# Altium PCB 四层板V3.0（改4s电池的那版）.PcbDoc (part 1 of 2)
Units mil, origin at the board's own origin, x right, y up, seen from the top; angles counter-clockwise.
Board outline 3411.06 x 2789.06 mil, 4 copper layers (Top Layer, GND, POW, Bottom Layer), stack 23.756 mil thick; 112 components, 75 nets, 401 pads, 165 vias.
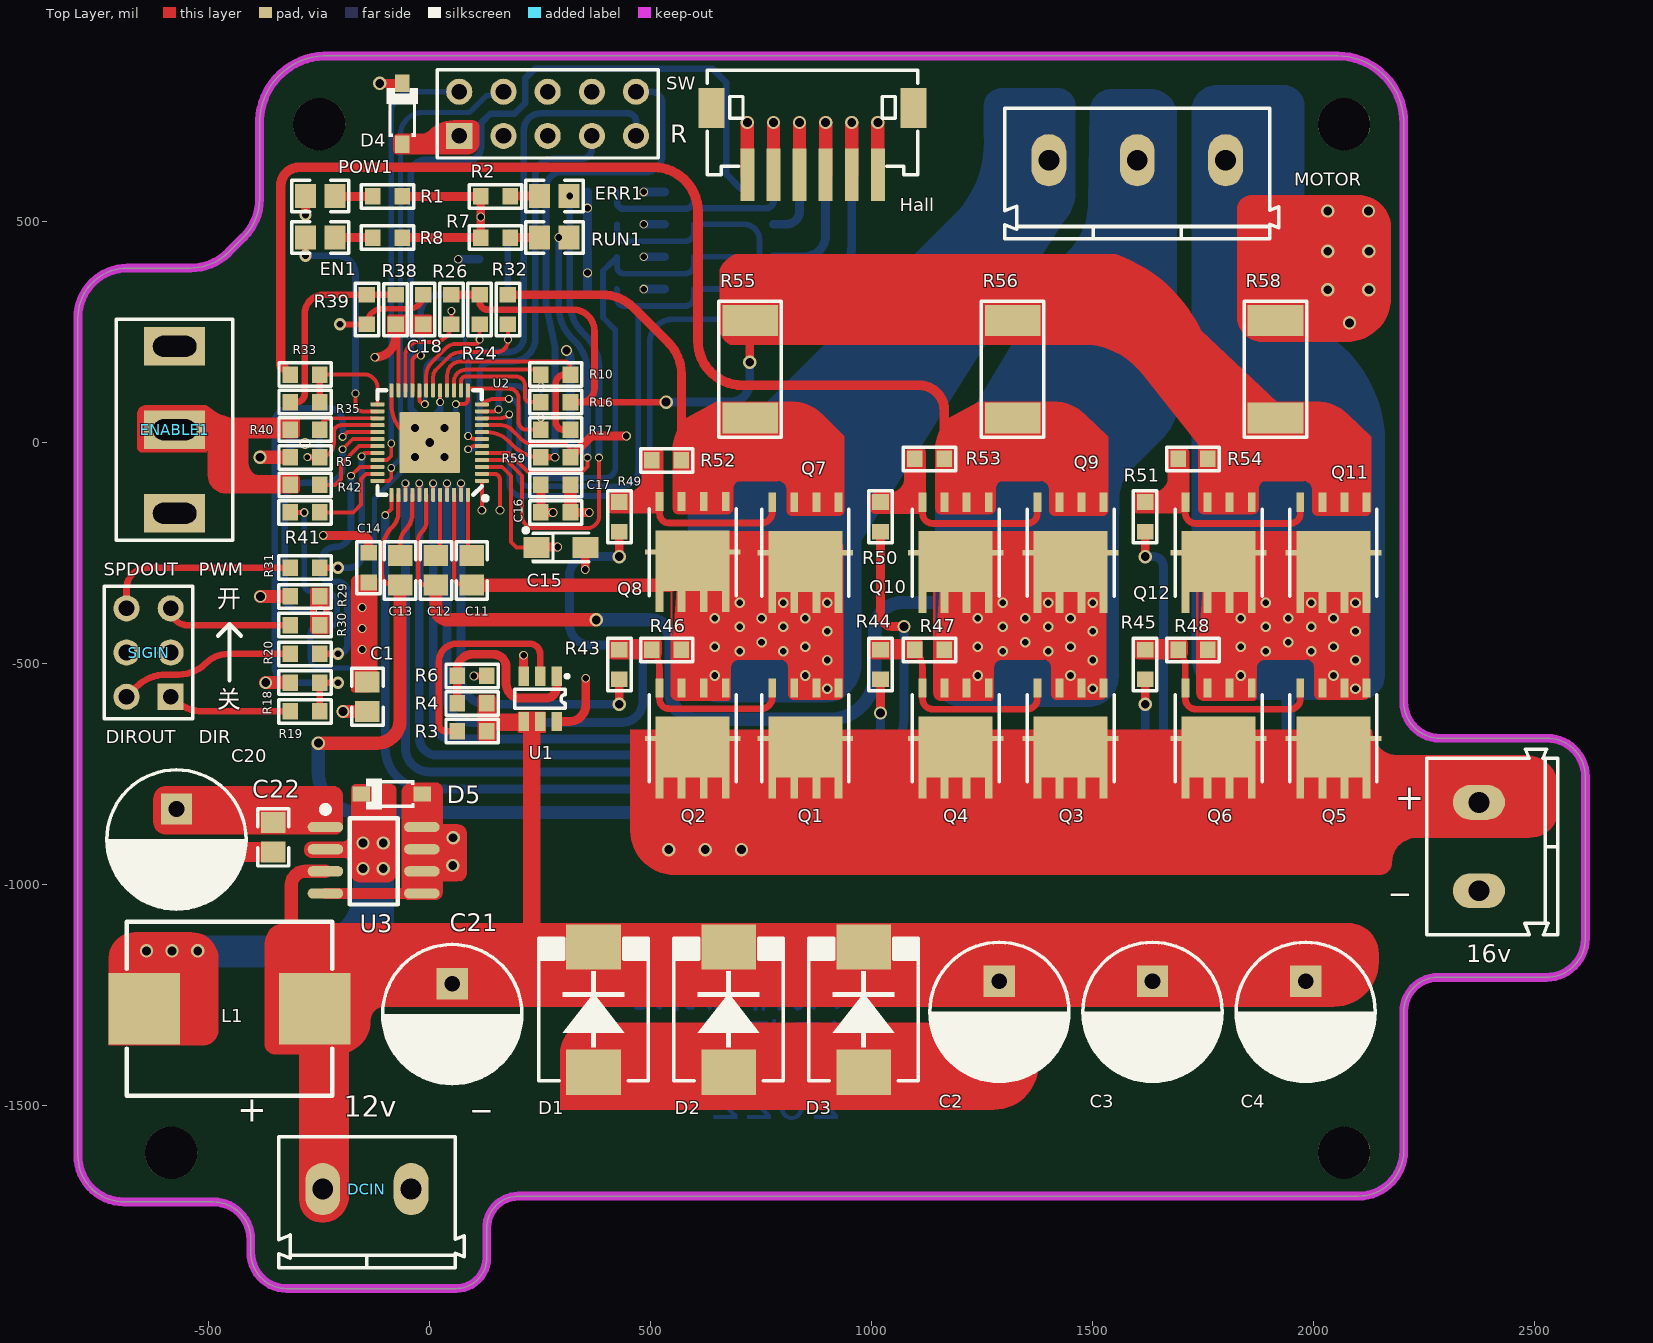
[diagram p0: Top Layer view]
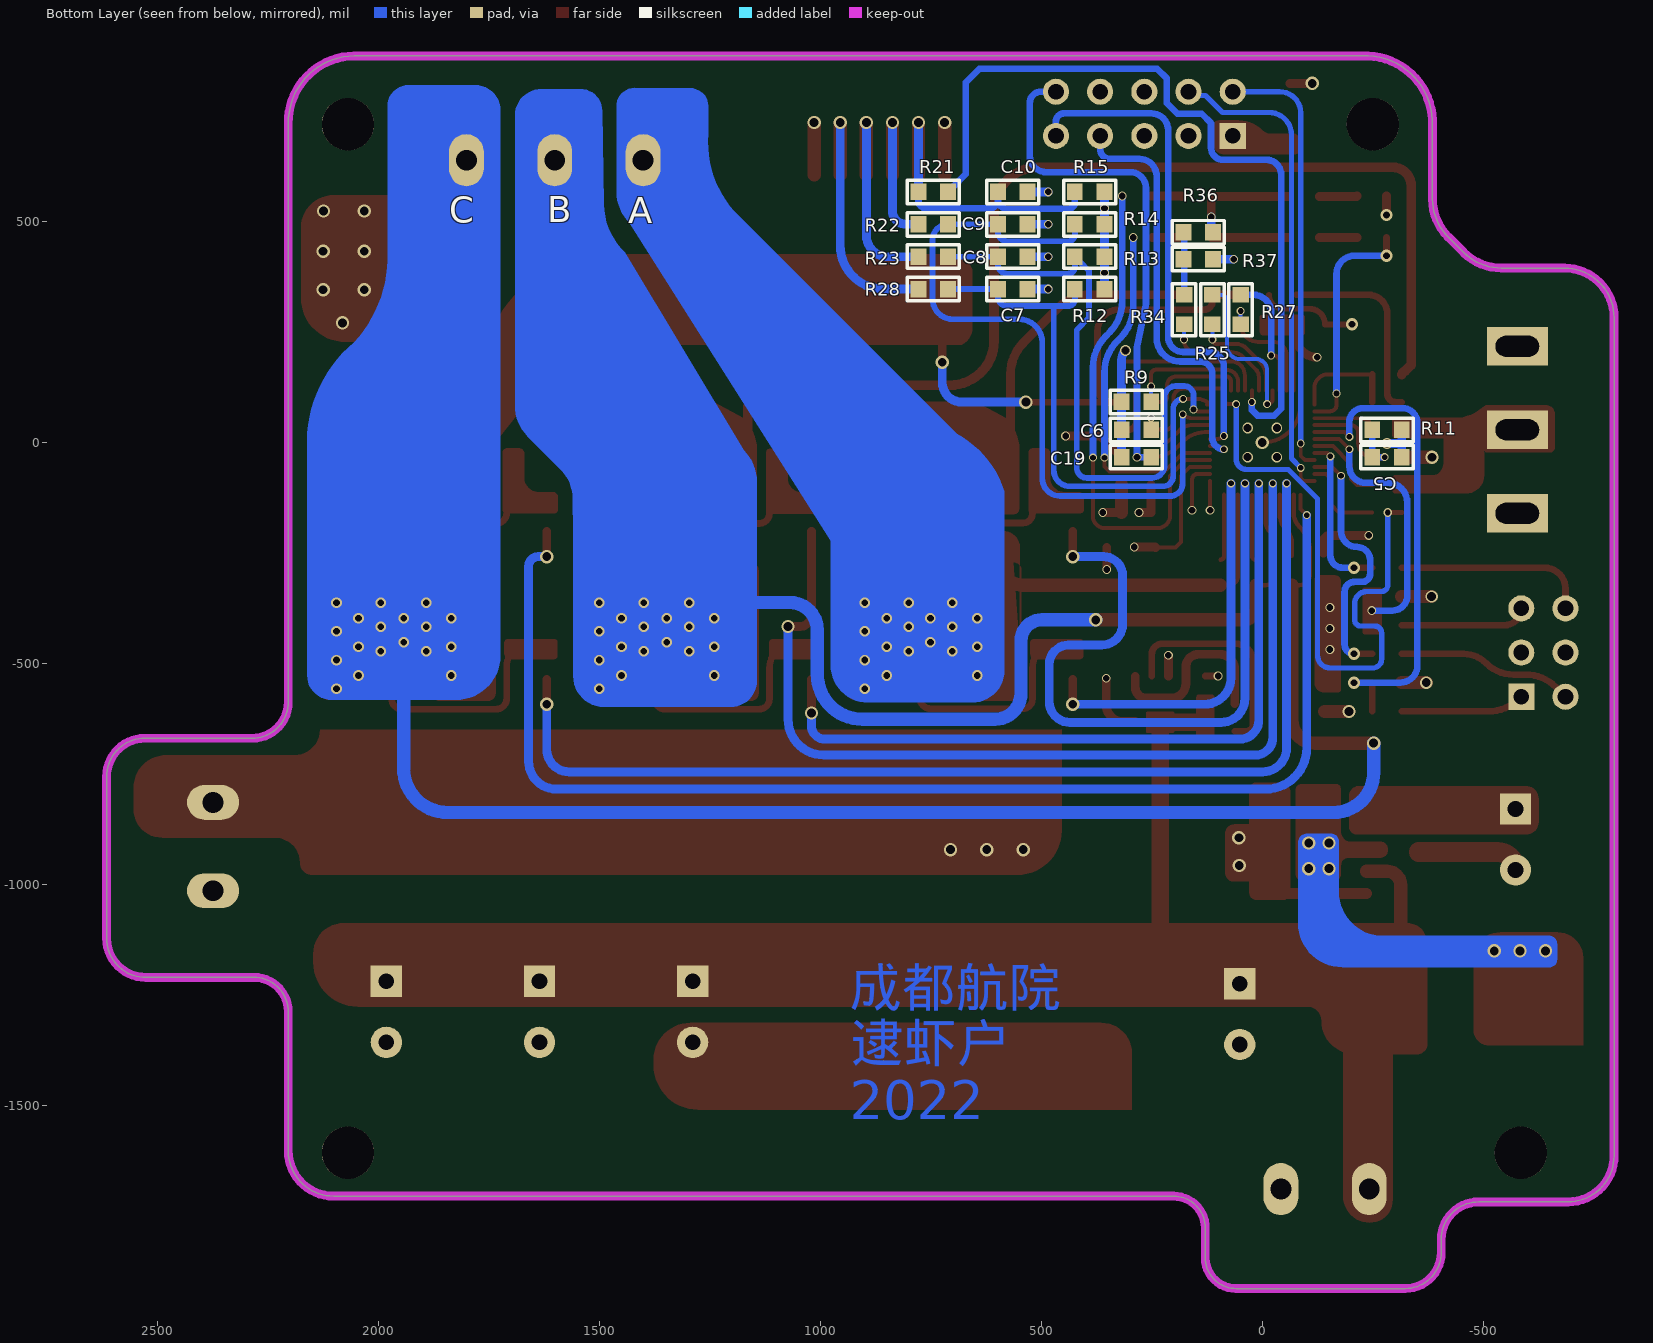
[diagram p1: Bottom Layer view, seen from below]
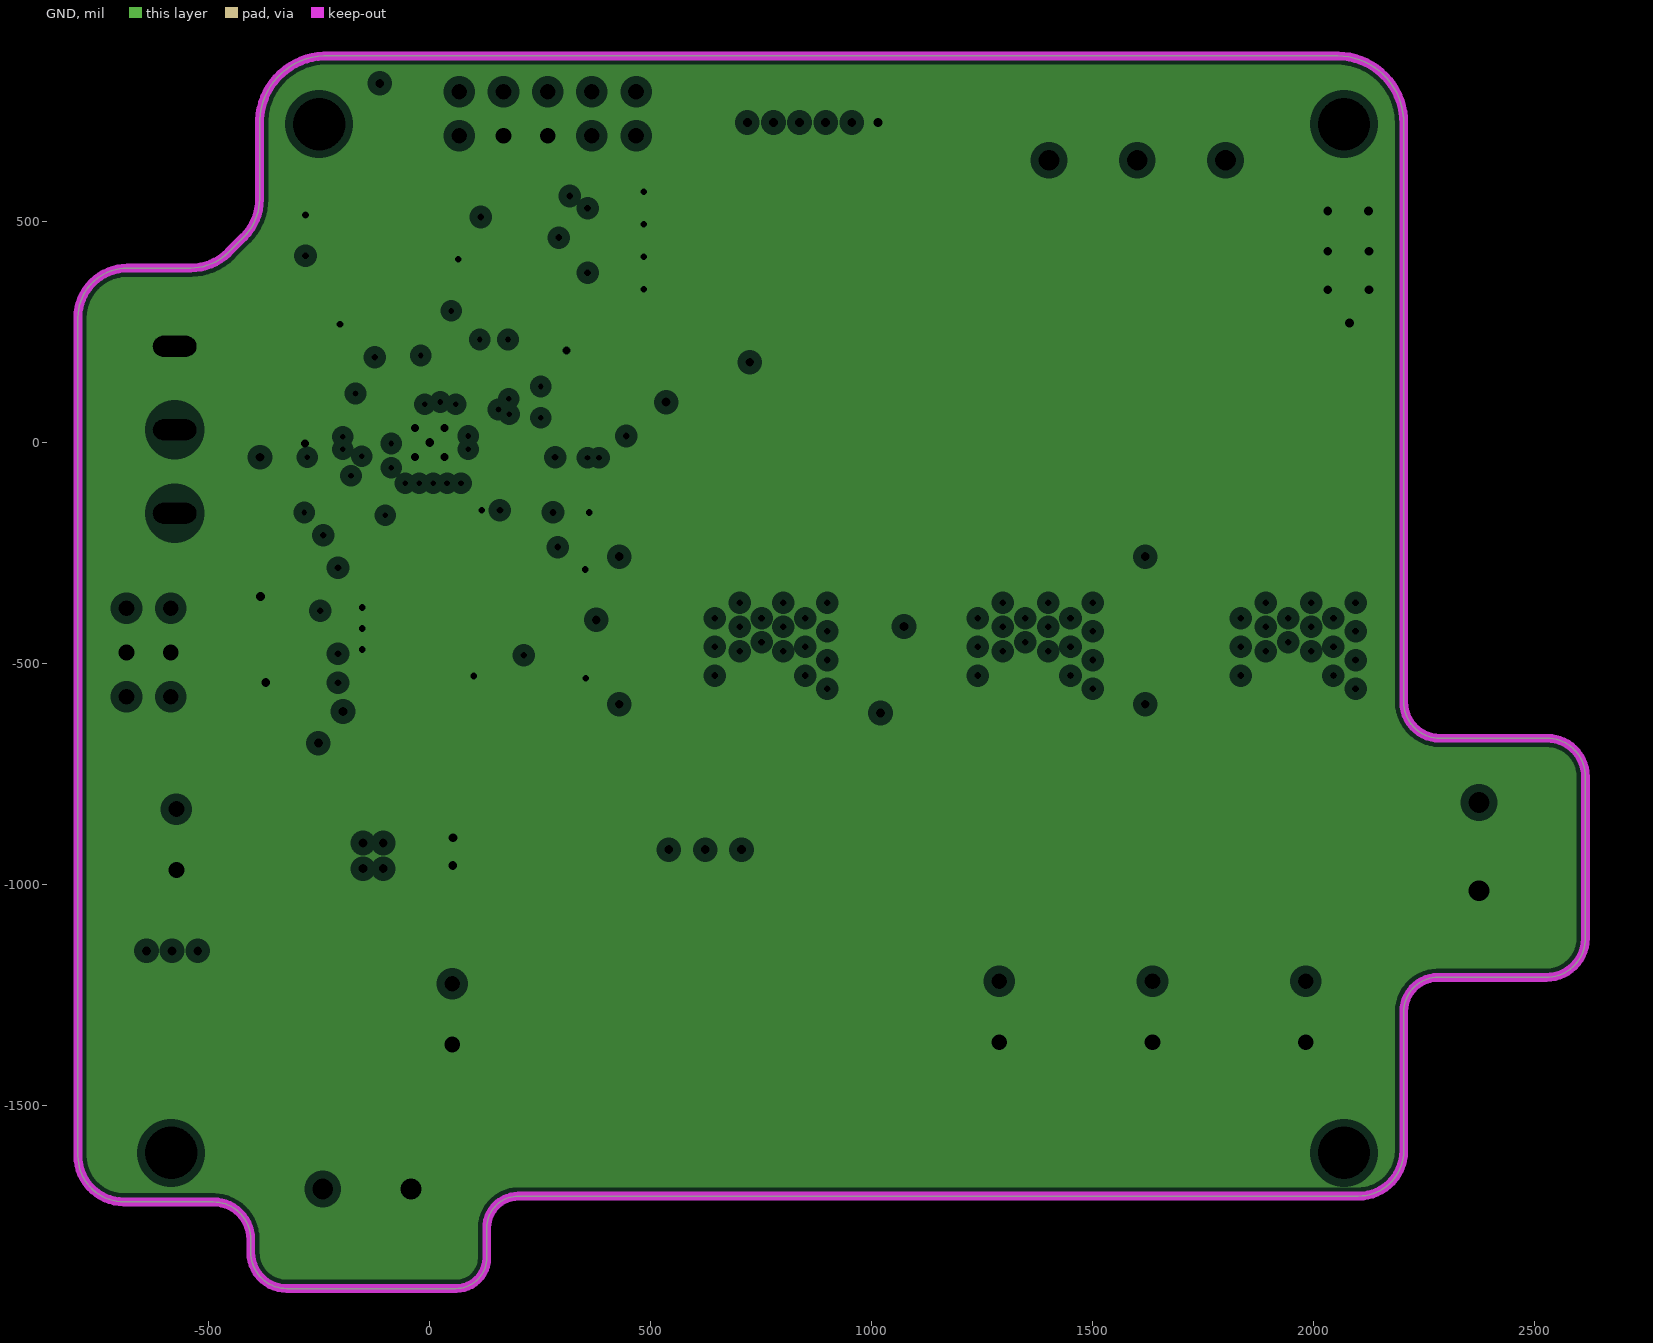
[diagram p2: GND, clearances drawn from the general rule]
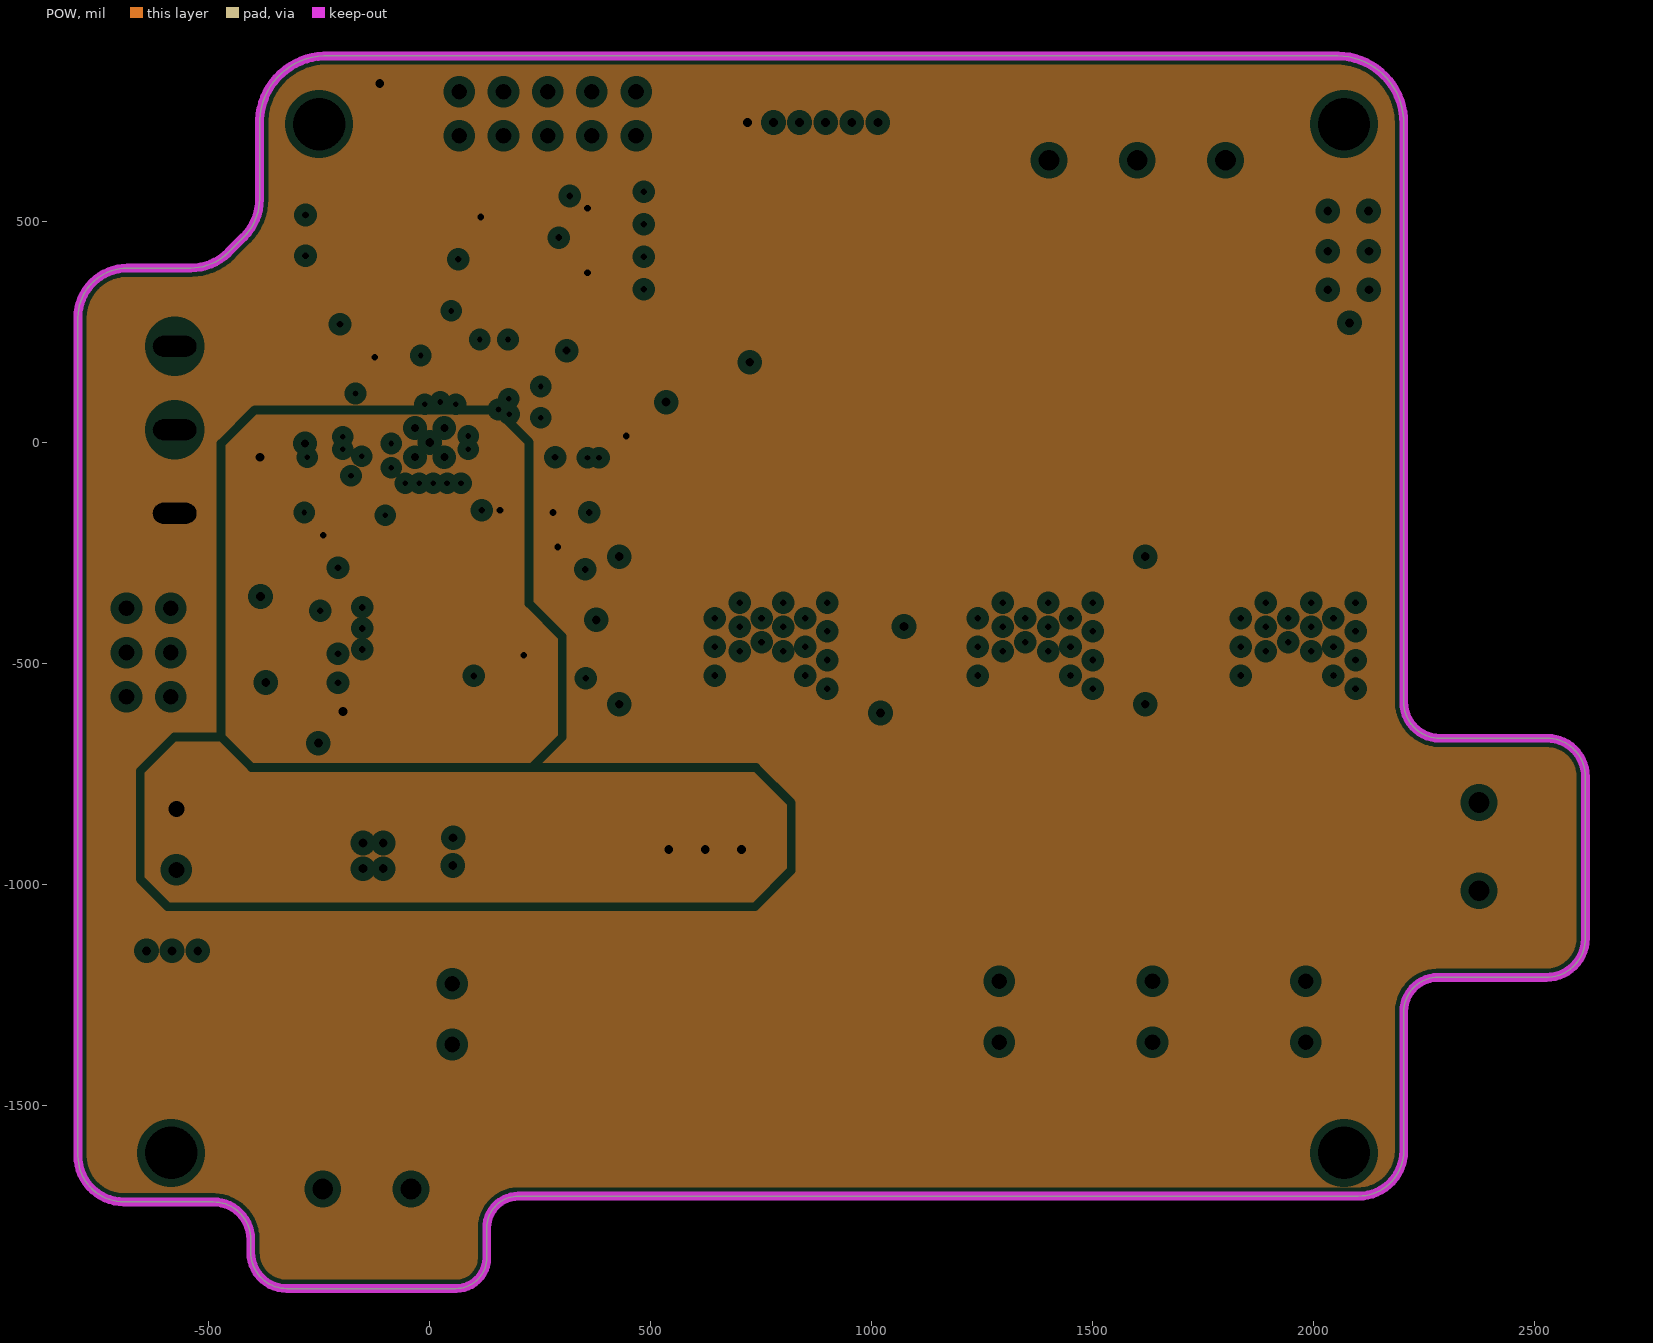
[diagram p3: POW, clearances drawn from the general rule]
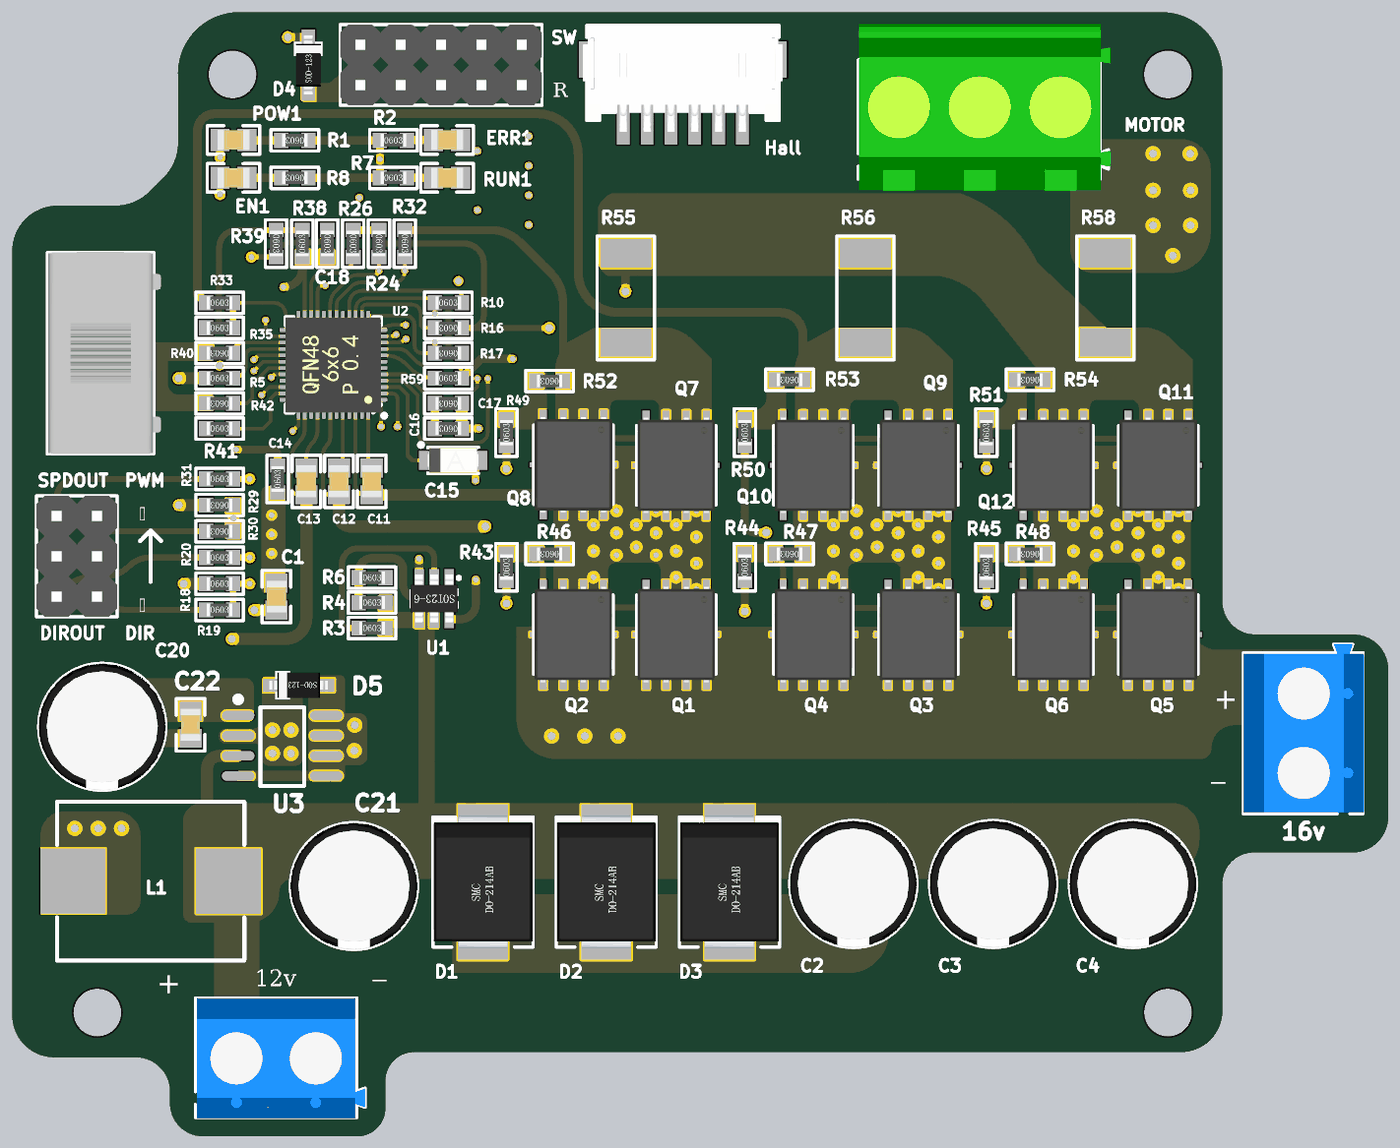
[diagram p5: 3D render of the assembled board from above, using the file's embedded part models]
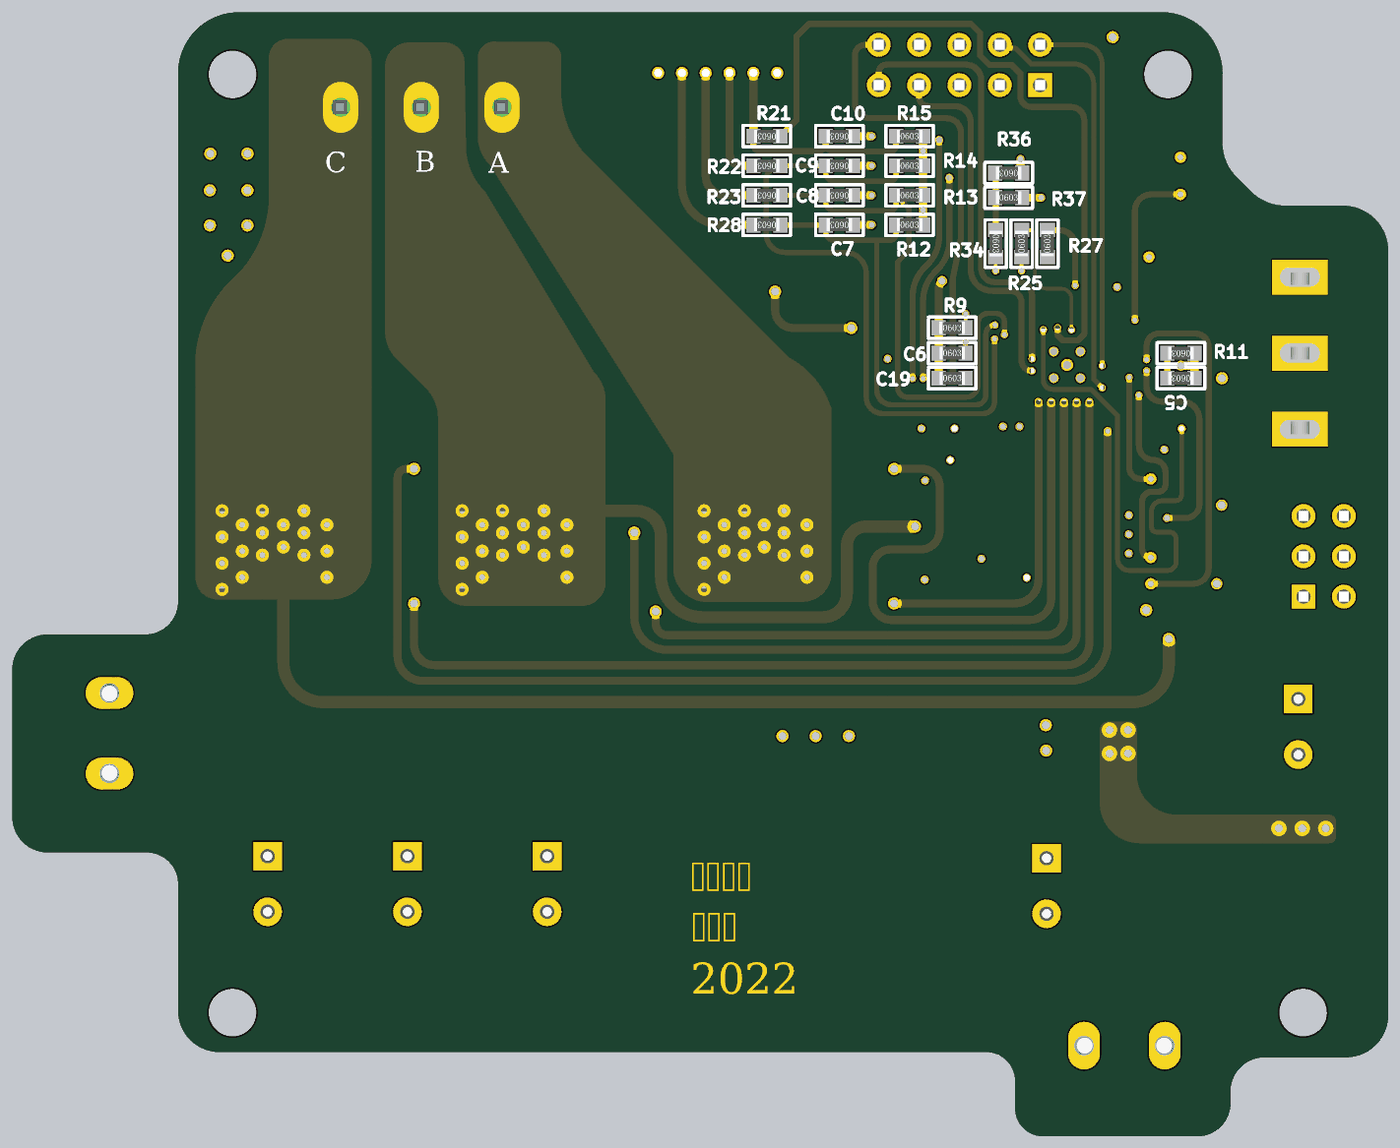
[diagram p6: 3D render of the assembled board from below, using the file's embedded part models]

## Layer stack, top to bottom
Top Solder: solder mask 0.4, Solder Resist, Dk 3.5
Top Layer: signal copper 1.4
Dielectric 2: prepreg 2.8, PP-006, Dk 4.1
GND: plane copper 1.3779, net GND
Dielectric 1: dielectric 12.6, FR-4, Dk 4.8
POW: plane copper 1.3779, net VCC5V
Dielectric 3: prepreg 2.8, PP-006, Dk 4.1
Bottom Layer: signal copper 1.4
Bottom Solder: solder mask 0.4, Solder Resist, Dk 3.5

## Board outline
-796.06,-1613.56 ccw(c-691.61,-1613.56) -691.61,-1718 -489.9,-1718 cw(c-489.9,-1802.9) -405,-1802.9 -405,-1832.25 ccw(c-323.25,-1832.25) -323.25,-1914 59.43,-1914 ccw(c59.43,-1844.43) 129,-1844.43 129,-1776.98 cw(c200.98,-1776.98) 200.98,-1705 2101.22,-1705 ccw(c2101.22,-1602.28) 2203.94,-1602.28 2203.94,-1287.51 cw(c2281.45,-1287.51) 2281.45,-1210 2526.26,-1210 ccw(c2526.26,-1121.26) 2615,-1121.26 2615,-755.72 ccw(c2528.28,-755.72) 2528.28,-669 2285.94,-669 cw(c2285.94,-587) 2203.94,-587 2203.94,722.01 ccw(c2052.87,723.98) 2054.84,875.06 -239.63,875.06 ccw(c-233.34,723.29) -385.11,717.01 -385.11,550.95 cw(c-505.82,550.95) -420.47,465.6 -455.7,430.36 cw(c-541.06,515.72) -541.06,395.01 -683.73,395.01 ccw(c-683.73,282.68) -796.06,282.68 -796.06,-1417.32

## Design rules (kind name [scope] priority, off if disabled: settings)
Clearance "Stitching VSC" [IsStitchingVia and InNet('VSC') vs (IsVia and (Not IsStitchingVia)) Or IsPad] p1: gap=15 ignorepadtopadclearanceinfootprint=FALSE
Clearance [All] p2: gap=6 ignorepadtopadclearanceinfootprint=FALSE
PlaneClearance [All] p1: clearance=18
PlaneConnect [All] p1: planeconnectstyle=Relief reliefexpansion=20 reliefentries=4 reliefconductorwidth=20 reliefairgap=10
PolygonConnect PolygonConnect_1 [InNet('VSA') vs InNet('VSA')] p1: connectstyle=Direct reliefconductorwidth=10 reliefentries=4 polygonreliefangle="90 Angle" airgapwidth=10
PolygonConnect [All] p2: connectstyle=Relief reliefconductorwidth=10 reliefentries=4 polygonreliefangle="90 Angle" airgapwidth=10
RoutingVias [All] p1: holewidth=28 width=50 viastyle="Through Hole" minholewidth=12 minwidth=17.72 maxholewidth=28 maxwidth=50
SolderMaskExpansion [All] p1: expansion=4
Width [All] p1: maxlimit=70 minlimit=9 preferedwidth=15 minimp=50.000000 maximp=50.000000 favimp=50.000000
28 further rules are at their usual default settings.

## Components (designator, comment, footprint, x,y, rotation, side; value= is the part's Value field where it differs from the comment)
16v "KF/WJ/DG 30x connecter" "KF/WJ/DG 301-2p-5.0mm" 2374,-914 r270 top (schematic designator DCIN?)
C1 "10uF ±10% 25V" CAPC2012[0805]S-N -141.06,-574.99 r90 top value=10uF
C2 "470uF 25V" CAPPR3.5-8X12 1288.96,-1287.99 r270 top value=470uF
C3 "470uF 25V" CAPPR3.5-8X12 1635.45,-1287.99 r270 top value=470uF
C4 "470uF 25V" CAPPR3.5-8X12 1981.94,-1287.99 r270 top value=470uF
C5 "100nF ±10% 50V" RESC1608[0603]S-N -282.11,-33 r0 bottom value=100nF
C6 "1uF ±10% 10V" RESC1608[0603]S-N 284.83,29 r180 bottom value=1uF
C7 "100nF ±10% 50V" RESC1608[0603]S-N 564.57,347.33 r0 bottom value=100nF
C8 "100nF ±10% 50V" RESC1608[0603]S-N 564.57,420.66 r0 bottom value=100nF
C9 "100nF ±10% 50V" RESC1608[0603]S-N 564.57,493.99 r0 bottom value=100nF
C10 "100nF ±10% 50V" RESC1608[0603]S-N 564.57,567.33 r0 bottom value=100nF
C11 "10uF ±10% 25V" CAPC2012[0805]S-N 95,-289 r270 top value=10uF
C12 "10uF ±10% 25V" CAPC2012[0805]S-N 14,-289 r270 top value=10uF
C13 "10uF ±10% 25V" CAPC2012[0805]S-N -67,-289 r270 top value=10uF
C14 "100nF ±10% 50V" RESC1608[0603]S-N -138.11,-282.99 r90 top value=100nF
C15 "10uF 16V" CAPT3216 297,-237 r0 top value=10uF
C16 "100nF ±10% 50V" RESC1608[0603]S-N 285,-158 r180 top value=100nF
C17 "100nF ±10% 50V" RESC1608[0603]S-N 285,-95.6 r180 top value=100nF
C18 "100nF ±10% 50V" RESC1608[0603]S-N -15,301 r270 top value=100nF
C19 "100nF ±10% 50V" RESC1608[0603]S-N 284.83,-33 r180 bottom value=100nF
C20 "470uF 25V" CAPPR3.5-8X12 -573,-898 r270 top value=470uF
C21 "180uF 25V" CAPPR3.5-8X12 51,-1293 r270 top value=180uF
C22 "1uF ±10% 25V" CAPC2012[0805]S-N -354,-893 r270 top value=1uF
D1 "SMDJ20CA" SMC[DO-214AB] 370.94,-1282.99 r90 top
D2 "SMDJ20CA" SMC[DO-214AB] 676.44,-1282.99 r90 top
D3 "SMDJ20CA" SMC[DO-214AB] 981.93,-1282.99 r90 top
D4 "1N5819" SOD-123-L -62.06,744.01 r90 top
D5 "1N5819" SOD-123-L -86,-795 r180 top
DCIN "KF/WJ/DG 30x connecter" "KF/WJ/DG 301-2p-5.0mm" -142,-1689 r180 top
EN1 "蓝色贴片LED" CAPC2012[0805]S-N -247.59,464.01 r180 top
ENABLE1 "SW-SPDT" SS12D10 -577.06,28.98 r270 top
ERR1 "黄色贴片LED" CAPC2012[0805]S-N 281.94,558.01 r0 top
Hall "Header 6" ZH1.5-WF-6P 866.36,606.01 r180 top
L1 "68uH" L1 -260,-1281 r180 top
MOTOR "KF/WJ/DG 30x connecter" "KF/WJ/DG 301-3p-5.0mm" 1600.94,639.01 r180 top
POW1 "红色贴片LED" CAPC2012[0805]S-N -247.59,558.01 r180 top
Q1 "TPH1R403NL" DFN5x6 849.95,-669.25 r180 top
Q2 "TPH1R403NL" DFN5x6 594.95,-669.25 r180 top
Q3 "TPH1R403NL" DFN5x6 1449.95,-669.25 r180 top
Q4 "TPH1R403NL" DFN5x6 1189.95,-669.25 r180 top
Q5 "TPH1R403NL" DFN5x6 2044.95,-669.25 r180 top
Q6 "TPH1R403NL" DFN5x6 1784.95,-669.25 r180 top
Q7 "TPH1R403NL" DFN5x6 849.95,-249.25 r180 top
Q8 "TPH1R403NL" DFN5x6 595,-247.67 r180 top
Q9 "TPH1R403NL" DFN5x6 1449.95,-249.25 r180 top
Q10 "TPH1R403NL" DFN5x6 1189.95,-249.25 r180 top
Q11 "TPH1R403NL" DFN5x6 2044.95,-249.25 r180 top
Q12 "TPH1R403NL" DFN5x6 1784.95,-249.25 r180 top
R1 "20K ±1%" RESC1608[0603]S-N -95.59,557.01 r180 top value=20K
R2 "10K ±1%" RESC1608[0603]S-N 148.94,557.01 r0 top value=10K
R3 "1M ±1%" RESC1608[0603]S-N 95.94,-653 r0 top value=1M
R4 "20K ±1%" RESC1608[0603]S-N 95.94,-590 r0 top value=20K
R5 "30K ±1%" RESC1608[0603]S-N -281.94,-33.2 r0 top value=30K
R6 "2K ±1%" RESC1608[0603]S-N 95.94,-528 r0 top value=2K
R7 "10K ±1%" RESC1608[0603]S-N 148.94,464.01 r0 top value=10K
R8 "10K ±1%" RESC1608[0603]S-N -95.59,464.01 r180 top value=10K
R9 "1K ±1%" RESC1608[0603]S-N 285,92 r180 bottom value=1K
R10 "47K ±1%" RESC1608[0603]S-N 284.94,154.01 r0 top value=47K
R11 "10K ±1%" RESC1608[0603]S-N -282.11,29 r0 bottom value=10K
R12 "4.7K ±1%" RESC1608[0603]S-N 390.57,347.33 r180 bottom value=4.7K
R13 "4.7K ±1%" RESC1608[0603]S-N 390.57,420.66 r180 bottom value=4.7K
R14 "4.7K ±1%" RESC1608[0603]S-N 390.57,493.99 r180 bottom value=4.7K
R15 "10K ±1%" RESC1608[0603]S-N 390.57,567.33 r180 bottom value=10K
R16 "1K ±1%" RESC1608[0603]S-N 285,91.61 r180 top value=1K
R17 "10K ±1%" RESC1608[0603]S-N 285,29.2 r180 top value=10K
R18 "10K ±1%" RESC1608[0603]S-N -282,-543.05 r0 top value=10K
R19 "100R ±1%" RESC1608[0603]S-N -282,-608.05 r0 top value=100R
R20 "100R ±1%" RESC1608[0603]S-N -282,-478.05 r0 top value=100R
R21 "100R ±1%" RESC1608[0603]S-N 744.57,567.33 r0 bottom value=100R
R22 "100R ±1%" RESC1608[0603]S-N 744.57,493.99 r0 bottom value=100R
R23 "100R ±1%" RESC1608[0603]S-N 744.57,420.66 r0 bottom value=100R
R24 "1K ±1%" RESC1608[0603]S-N 113,301 r270 top value=1K
R25 "100K ±1%" RESC1608[0603]S-N 112.89,301 r90 bottom value=100K
R26 "1K ±1%" RESC1608[0603]S-N 49,301 r270 top value=1K
R27 "100K ±1%" RESC1608[0603]S-N 48.89,301 r90 bottom value=100K
R28 "100R ±1%" RESC1608[0603]S-N 744.57,347.33 r0 bottom value=100R
R29 "10K ±1%" RESC1608[0603]S-N -282.06,-348.05 r180 top value=10K
R30 "100R ±1%" RESC1608[0603]S-N -282.06,-413.05 r180 top value=100R
R31 "100R ±1%" RESC1608[0603]S-N -282,-283.05 r0 top value=100R
R32 "1K ±1%" RESC1608[0603]S-N 177,301 r270 top value=1K
R33 "1K ±1%" RESC1608[0603]S-N -281.94,154.01 r0 top value=1K
R34 "100K ±1%" RESC1608[0603]S-N 176.89,300.94 r270 bottom value=100K
R35 "100K ±1%" RESC1608[0603]S-N -281.94,91.61 r0 top value=100K
R36 "10K ±1%" RESC1608[0603]S-N 144.94,476 r0 bottom value=10K
R37 "10K ±1%" RESC1608[0603]S-N 144.89,415 r180 bottom value=10K
R38 "10K ±1%" RESC1608[0603]S-N -77,301 r90 top value=10K
R39 "10K ±1%" RESC1608[0603]S-N -142,301 r270 top value=10K
R40 "1K ±1%" RESC1608[0603]S-N -282,29.2 r180 top value=1K
R41 "100R ±1%" RESC1608[0603]S-N -282,-158 r0 top value=100R
R42 "1K ±1%" RESC1608[0603]S-N -282,-95.6 r180 top value=1K
R43 "4R7 ±1%" RESC1608[0603]S-N 429,-501.94 r90 top value=4R7
R44 "4R7 ±1%" RESC1608[0603]S-N 1020,-501.94 r90 top value=4R7
R45 "4R7 ±1%" RESC1608[0603]S-N 1618.95,-501.94 r90 top value=4R7
R46 "10K ±1%" RESC1608[0603]S-N 536,-468.94 r180 top value=10K
R47 "10K ±1%" RESC1608[0603]S-N 1131,-468.94 r180 top value=10K
R48 "10K ±1%" RESC1608[0603]S-N 1726.95,-468.94 r180 top value=10K
R49 "4R7 ±1%" RESC1608[0603]S-N 429,-167.99 r90 top value=4R7
R50 "4R7 ±1%" RESC1608[0603]S-N 1020,-167.99 r90 top value=4R7
R51 "4R7 ±1%" RESC1608[0603]S-N 1618.95,-167.99 r90 top value=4R7
R52 "10K ±1%" RESC1608[0603]S-N 536,-39.99 r180 top value=10K
R53 "10K ±1%" RESC1608[0603]S-N 1131,-36.99 r180 top value=10K
R54 "10K ±1%" RESC1608[0603]S-N 1726.95,-36.99 r180 top value=10K
R55 "2mR ±1%" RESC6332[2512]S 724.95,166.06 r270 top value=2mR
R56 "2mR ±1%" RESC6332[2512]S 1318.95,166.06 r270 top value=2mR
R58 "2mR ±1%" RESC6332[2512]S 1913.95,166.06 r270 top value=2mR
R59 "10K ±1%" RESC1608[0603]S-N 285,-33.2 r0 top value=10K
RUN1 "翠绿贴片LED" CAPC2012[0805]S-N 281.94,464.01 r0 top
SIGIN "Header 3X2" HDR2X3 -586.06,-574.99 r90 top
SW "Header 5X2" HDR2X5 66.94,694.01 r0 top
U1 "ETA7014" SOT-23-6 249.94,-579.82 r270 top
U2 "MM32SPIN360C" QFN48-6X6 0,0 r180 top
U3 "XL1509" XL1509 -236,-870 r0 top

## Footprints (in the part's own frame and the unit in brackets; to place one, negate y for a bottom-side part, rotate by r counter-clockwise, add the part's x,y. Pads: shape width x height; smd on the part's side, far side on the other; paste and mask are expansions set on the pad)
CAPC2012[0805]S-N [mm]
  rect 1.2x1.4 smd: 1(-0.85,0) 2(0.85,0)
  silkscreen extent -1.65,-0.9 1.65,0.9, body extent -1,-0.63 1,0.62, height 1.25
CAPPR3.5-8X12 [mm]
  rect 1.8x1.8 hole 0.9: 1(-1.75,0)
  round 1.8 hole 0.9: 2(1.75,0)
  silkscreen extent -4,-4.01 4,4, body extent -4,-4 4,4, height 12
CAPT3216 [mm]
  rect 1.5x1.2 smd: 1(-1.4,0) 2(1.4,0)
  silkscreen extent -2.15,-0.9 1.6,1.1, body extent -1.6,-0.8 1.6,0.8, height 1.6
DFN5x6 [mm]
  rect 0.45x1.6 smd: 1(-1.905,2.65) 1(-0.635,2.65) 1(0.635,2.65) 1(1.905,2.65)
  rect 5.5x0.3 smd: 1(0,0)
  rect 4.25x3.5 smd: 1(0,0.5)
  rect 0.45x1.1 smd: 2(1.905,-2.9) 3(-1.905,-2.9) 3(-0.635,-2.9) 3(0.635,-2.9)
  silkscreen extent -2.5,-2.5 2.5,2.5, body extent -2.45,-3 2.45,3, height 1
HDR2X3 [mm]
  rect 1.5x1.5 hole 0.9: 1(0,0)
  round 1.5 hole 0.9: 2(0,2.54) 3(2.54,0) 4(2.54,2.54) 5(5.08,0) 6(5.08,2.54)
  silkscreen extent -1.27,-1.27 6.35,3.81, body extent -1.27,-1.27 6.35,3.81, height 8.54
HDR2X5 [mm]
  rect 1.5x1.5 hole 0.9: 1(0,0)
  round 1.5 hole 0.9: 2(0,2.54) 3(2.54,0) 4(2.54,2.54) 5(5.08,0) 6(5.08,2.54) 7(7.62,0) 8(7.62,2.54) 9(10.16,0) 10(10.16,2.54)
  silkscreen extent -1.27,-1.27 11.43,3.81, body extent -1.27,-1.27 11.43,3.81, height 8.54
"KF/WJ/DG 301-2p-5.0mm" [mm]
  oval 2x3 hole 1.2: 1(2.54,0) 2(-2.54,0)
  silkscreen extent -5.6,-3 5.08,4.52, body extent -5.6,-3 5,4.6, height 10
"KF/WJ/DG 301-3p-5.0mm" [mm]
  oval 2x3 hole 1.2: 1(5.08,0) 2(0,0) 3(-5.08,0)
  silkscreen extent -8.14,-3 7.62,4.52, body extent -8.27,-5.26 7.57,5.24, height 14.35
L1 [mm]
  rect 4.1x4.1 smd: 1(0,0) 2(9.8,0)
  silkscreen extent -1,-5 10.8,5
QFN48-6X6 [mm]
  rrect5% 3.5x3.5 smd paste+0 mask+0.05: 0(0,0)
  rrect50% 0.8x0.23 smd paste+0 mask+0.05: 1(-3,2.2) 2(-3,1.8) 3(-3,1.4) 4(-3,1) 5(-3,0.6) 6(-3,0.2) 7(-3,-0.2) 8(-3,-0.6) 9(-3,-1) 10(-3,-1.4) 11(-3,-1.8) 12(-3,-2.2) 25(3,-2.2) 26(3,-1.8) 27(3,-1.4) 28(3,-1) 29(3,-0.6) 30(3,-0.2) 31(3,0.2) 32(3,0.6) 33(3,1) 34(3,1.4) 35(3,1.8) 36(3,2.2)
  rrect50% 0.23x0.8 smd paste+0 mask+0.05: 13(-2.2,-3) 14(-1.8,-3) 15(-1.4,-3) 16(-1,-3) 17(-0.6,-3) 18(-0.2,-3) 19(0.2,-3) 20(0.6,-3) 21(1,-3) 22(1.4,-3) 23(1.8,-3) 24(2.2,-3) 37(2.2,3) 38(1.8,3) 39(1.4,3) 40(1,3) 41(0.6,3) 42(0.2,3) 43(-0.2,3) 44(-0.6,3) 45(-1,3) 46(-1.4,3) 47(-1.8,3) 48(-2.2,3)
  silkscreen extent -3.33,-3 3,3.32, body extent -3.02,-3.02 3.02,3.02, height 0.65
RESC1608[0603]S-N [mm]
  rect 0.9x0.95 smd: 1(-0.85,0) 2(0.85,0)
  silkscreen extent -1.5,-0.67 1.5,0.67, body extent -0.8,-0.4 0.8,0.4, height 0.45
RESC6332[2512]S [mm]
  rect 1.8x3.2 smd: 1(-2.8,0) 2(2.8,0)
  silkscreen extent -3.9,-1.8 3.9,1.8, body extent -3.22,-1.68 3.22,1.68, height 0.71
SMC[DO-214AB] [mm]
  rect 2.6x3.15 smd: A(-3.6,0) K(3.6,0)
  silkscreen extent -4.1,-3.15 4.1,3.15, body extent -4.17,-3.11 4.18,3.11, height 2.3
SOD-123-L [mm]
  rect 1x0.85 smd: A(-1.75,0) K(1.75,0)
  silkscreen extent -1.32,-0.9 1.48,0.9, body extent -1.85,-0.8 1.85,0.8, height 1.2
SOT-23-6 [mm]
  rect 1.1x0.6 smd: 1(-1.3,0.95) 2(-1.3,0) 3(-1.3,-0.95) 4(1.3,-0.95) 5(1.3,0) 6(1.3,0.95)
  silkscreen extent -1.37,-1.45 0.55,1.63, body extent -1.5,-1.5 1.5,1.5, height 1.55
SS12D10 [mm]
  rect 2.2x3.5 hole 1.2 slot 2.5 at 90 deg mask+0.07: 1(-4.8,0) 2(0,0) 3(4.8,0)
  silkscreen extent -6.35,-3.35 6.35,3.35, body extent -6.4,-3.3 6.35,3.8, height 12.5
XL1509 [mm]
  oval 2.045x0.588 smd: 1(0,0) 2(0,-1.27) 3(0,-2.54) 4(0,-3.81) 5(5.545,-3.81) 6(5.545,-2.54) 7(5.545,-1.27) 8(5.545,0)
  silkscreen extent -0.18,-4.45 4.15,1.2
ZH1.5-WF-6P [mm]
  rect 1.5x2.3 smd: 0(-5.8,-3.85) 0(5.8,-3.85)
  rect 0.8x3 smd: 1(-3.75,0) 2(-2.25,0) 3(-0.75,0) 4(0.75,0) 5(2.25,0) 6(3.75,0)
  silkscreen extent -6.05,-6 6.05,0, body extent -6.29,-6 6.29,0.71, height 3.9

## Part data
16v DCIN: library part "KF/WJ/DG 30x", "接线端子 2Pin"
C1 C11 C12 C13 C22: library part Cap-Chip, "贴片电容", Tolerance=±10%, Voltage=25V, Published=2020-12-18, Revision=V1.1
C2 C3 C4 C20 C21: library part Cap-Elect, "Polarized Capacitor (Radial)", Voltage=25V, Price(RMB)=0.000, Published=8-Jun-2000, Publisher="Altium Limited", Revision="July-2002: Re-released for DXP Platform."
C5 C7 C8 C9 C10 C14 C16 C17 C18 C19: library part Cap-Chip_1, "贴片电容", Tolerance=±10%, Voltage=50V, Published=2020-12-18, Revision=V1.1
C6: library part Cap-Chip_2, "贴片电容", Tolerance=±10%, Voltage=10V, Published=2020-12-18, Revision=V1.1
C15: library part Cap-Tan, "Tantalum Capacitor", Voltage=16V, Price(RMB)=0.000, Published=8-Jun-2000, Publisher="Altium Limited", Revision="July-2002: Re-released for DXP Platform."
D1 D2 D3: library part "Diode TVS Bi-Dir", "TRANSIENT VOLTAGE  SUPPRESSOR DIODE", Imax=500mA, Price(RMB)=0.000, Published=8-Jun-2000, Publisher="Altium Limited"
D4 D5: library part Diode, "普通二极管 Diode", Imax=500mA, Price(RMB)=0.000, Published=8-Jun-2000, Publisher="Altium Limited", Revision="July-2002: Re-released for DXP Platform."
EN1: library part "LED Chip Blue", Color=Blue, Price(RMB)=0.00, Published=8-Jun-2000, Publisher="Altium Limited", Revision="July-2002: Re-released for DXP Platform."
ENABLE1: "单刀双掷开关 3脚船型、钮子、拨动开关 SPDT Subminiature Toggle Switch"
ERR1: library part "LED Chip Yellow", Price(RMB)=0.00, Published=8-Jun-2000, Publisher="Altium Limited", Revision="July-2002: Re-released for DXP Platform."
Hall: "Header, 6-Pin", LatestRevisionDate=17-Jul-2002, LatestRevisionNote="Re-released for DXP Platform.", Price(RMB)=0.00, Publisher="Altium Limited"
L1: library part 电感
MOTOR: library part "KF/WJ/DG 30x-3P", "接线端子 3Pin"
POW1: library part "LED Chip Red", Price(RMB)=0.00, Published=8-Jun-2000, Publisher="Altium Limited", Revision="July-2002: Re-released for DXP Platform."
Q1 Q2 Q3 Q4 Q5 Q6 Q7 Q8 Q9 Q10 Q11 Q12: "东芝 N沟 MOS"
R1 R4: library part Res-Chip_2, "贴片电阻", Tolerance=±1%, Published=8-Jun-2000, Revision="July-2002: Re-released for DXP Platform."
R2 R7 R8 R11 R17 R18 R29 R36 R37 R38 R39 R46 R47 R48 R52 R53 R54 R59: library part Res-Chip, "贴片电阻", Tolerance=±1%, Published=8-Jun-2000, Revision="July-2002: Re-released for DXP Platform."
R3: library part Res-Chip_6, "贴片电阻", Tolerance=±1%, Published=8-Jun-2000, Revision="July-2002: Re-released for DXP Platform."
R5: library part Res-Chip_1, "贴片电阻", Tolerance=±1%, Published=8-Jun-2000, Revision="July-2002: Re-released for DXP Platform."
R6: library part Res-Chip_9, "贴片电阻", Tolerance=±1%, Published=8-Jun-2000, Revision="July-2002: Re-released for DXP Platform."
R9 R16 R24 R26 R32 R33 R40 R42: library part Res-Chip_3, "贴片电阻", Tolerance=±1%, Published=8-Jun-2000, Revision="July-2002: Re-released for DXP Platform."
R10: library part Res-Chip_4, "贴片电阻", Tolerance=±1%, Published=8-Jun-2000, Revision="July-2002: Re-released for DXP Platform."
R12 R13 R14 R15: library part Res-Chip_7, "贴片电阻", Tolerance=±1%, Published=8-Jun-2000, Revision="July-2002: Re-released for DXP Platform."
R19 R20 R21 R22 R23 R28 R30 R31 R41: library part Res-Chip_8, "贴片电阻", Tolerance=±1%, Published=8-Jun-2000, Revision="July-2002: Re-released for DXP Platform."
R25 R27 R34 R35: library part Res-Chip_5, "贴片电阻", Tolerance=±1%, Published=8-Jun-2000, Revision="July-2002: Re-released for DXP Platform."
R43 R44 R45 R49 R50 R51: library part Res-Chip_10, "贴片电阻", Tolerance=±1%, Published=8-Jun-2000, Revision="July-2002: Re-released for DXP Platform."
R55 R56 R58: library part Res-Chip_11, "贴片电阻", Tolerance=±1%, Published=8-Jun-2000, Revision="July-2002: Re-released for DXP Platform."
RUN1: library part "LED Chip Green", Price(RMB)=0.00, Published=8-Jun-2000, Publisher="Altium Limited", Revision="July-2002: Re-released for DXP Platform."
SIGIN: "Header, 3-Pin, Dual row", LatestRevisionDate=17-Jul-2002, LatestRevisionNote="Re-released for DXP Platform.", Price(RMB)=0.00, Publisher="Altium Limited"
SW: "Header, 5-Pin, Dual row", LatestRevisionDate=17-Jul-2002, LatestRevisionNote="Re-released for DXP Platform.", Price(RMB)=0.00, Publisher="Altium Limited"
U1: "ETA7014 OVPоƬ"
U2: ComponentLink1Description="Manufacturer Link", ComponentLink1URL=www.st.com/stm32, ComponentLink2Description=Datasheet, ComponentLink2URL=http://www.st.com/stonline/products/literature/ds/13587.pdf, DatasheetVersion="rev6, Mar-2008", PackageDescription="48-Pin Low-Profile Quad Flat Pack, 7 x 7 mm Body, 0.5 mm Pitch (LQFP48)", PackageReference=LQFP48, PackageVersion=Mar-2008, Published=30-May-2008, Publisher="Altium Limited"

## Free pads (board coordinates)
  round 118.11 hole 118.11 unplated: 0(-585,-1607) 0(-250.11,720.51) 0(2068.89,720.51) 0(2069,-1607)

## Via types
v1: diameter 24, hole 15, Top Layer to Bottom Layer, 54 vias
v2: diameter 30, hole 20, Top Layer to Bottom Layer, 39 vias
v3: diameter 18, hole 13, Top Layer to Bottom Layer, 30 vias
v4: diameter 20, hole 15, Top Layer to Bottom Layer, 27 vias
v5: diameter 28, hole 15, Top Layer to Bottom Layer, 6 vias
v6: diameter 24, hole 18, Top Layer to Bottom Layer, 4 vias
v7: diameter 25, hole 18, Top Layer to Bottom Layer, 2 vias
v8: diameter 28, hole 20, Top Layer to Bottom Layer, 2 vias
v9: diameter 20, hole 13, Top Layer to Bottom Layer, 1 vias

## Nets (pads, with @x,y where several pads share a name; then routed paths per layer and width w, separated by ;. In a path a pad name is that pad's centre, name@x,y a point inside that pad or via, vN(x,y) a via of type N, cw(c..) or ccw(c..) an arc to the next point about the centre after c; other vN are vias at no path point)
A0: C9.2 R14.1 R22.1 U2.10 | length 1726.7
  Top Layer w9: U2.10@118.11,55.12 158.56,55.12 ccw(c158.56,85.44) v3(180,64)
  Bottom Layer w13: v3(180,64) 180,-92.15 ccw(c208.85,-92.15) 208.85,-121 457.09,-121 ccw(c457.09,-80.09) 498,-80.09 498,227.02 cw(c549.98,227.02) 549.98,279 700,279 ccw(c700,325) 746,325 746,459.1 ccw(c711.11,459.1) R22.1@711.11,493.99 C9.2@598.04,493.99 598.04,476.11 cw(c577.6,476.11) 577.6,455.67 439,455.67 cw(c439,470.63) 424.04,470.63 R14.1@424.04,493.99
A1: C8.2 R13.1 R23.1 U2.11 | length 1398.9
  Top Layer w9: U2.11@118.11,70.87 145.47,70.87 ccw(c145.47,84.98) v3(155.45,75) v3@159,75
  Bottom Layer w13: v3(155.45,75) 155.45,106.96 cw(c176.49,106.96) 176.49,128 195.63,128 cw(c195.63,102.48) 221.15,102.48 221.15,-51.56 ccw(c249.59,-51.56) 249.59,-80 396.52,-80 ccw(c396.52,-56.52) 420,-56.52 420,255 392,283 392,388.62 412.84,409.46 413.82,409.46 R13.1@424.04,419.68 ; R13.1@424.04,420.66 R13.1@424.04,419.68 ; R23.1@711.11,420.66 C8.2@598.04,420.66 598.04,402.77 cw(c577.6,402.77) 577.6,382.33 439,382.33 cw(c439,397.29) 424.04,397.29 R13.1@424.04,419.68
A2: C7.2 R12.1 R28.1 U2.12 | length 1284.8
  Top Layer w9: U2.12@125.68,86.61 U2.12@118.11,86.61 cw(c148.01,56.71) 148.01,99 v3(179,99)
  Bottom Layer w13: v3(179,99) cw(c179,76.5) 201.5,76.5 201.5,-75.5 ccw(c225,-75.5) 225,-99 435.03,-99 ccw(c435.03,-62.03) 472,-62.03 472,307 cw(c474,307) 474,309 ; R12.1@424.04,347.33 424.04,323.96 ccw(c439,323.96) 439,309 474,309 ; R28.1@711.11,347.33 C7.2@598.04,347.33 598.04,329.44 cw(c577.6,329.44) 577.6,309 474,309
A3: C6.2 R17.2 R41.1 U2.13 | length 1689.9
  Top Layer w9: v3@67,87 75.43,87 ccw(c75.43,98.19) 86.61,98.19 86.61,122.11 179.29,122.11 cw(c179.29,100.4) 201,100.4 201,47.61 ccw(c219.41,47.61) 219.41,29.2 R17.2@251.54,29.2 v3(251.54,56.21)
  Top Layer w12: R41.1@-315.46,-158 v9(-284,-158)
  Bottom Layer w9: C6.2@251.37,29 251.54,29.17 v3(251.54,56.21)
  Bottom Layer w12: v9(-284,-158) -284,-322 ccw(c-269,-322) -269,-337 -236.2,-337 cw(c-236.2,-364.2) -209,-364.2 -209,-401.52 cw(c-222.48,-401.52) -222.48,-415 -254.34,-415 ccw(c-254.34,-430.66) -270,-430.66 -270,-489.71 ccw(c-249.71,-489.71) -249.71,-510 -153.83,-510 ccw(c-153.83,-481.17) -125,-481.17 -125,-127 -58.78,-60.78 35.86,-60.78 ccw(c35.86,-37.63) 59,-37.63 v3(59,87)
A4: R16.2 U2.14 | length 252.1
  Top Layer w9: U2.14@70.87,118.11 70.87,138.87 cw(c82,138.87) 82,150 193.83,150 cw(c193.83,127.83) 216,127.83 216,102.19 ccw(c226.59,102.19) 226.59,91.61 R16.2@251.54,91.61
A5: R9.2 R10.1 U2.15 | length 300.1
  Top Layer w9: U2.15@55.12,118.11 55.12,138.29 cw(c81.83,138.29) 81.83,165 240.49,165 cw(c240.49,154.01) R10.1@251.48,154.01 v3(251.48,127)
  Bottom Layer w9: v3(251.48,127) R9.2@251.54,92 R9.2@251.54,92
A6: R10.2 R17.1 U2.16 | length 530
  Top Layer w9: U2.16@39.37,118.11 39.37,152.23 cw(c71.14,152.23) 71.14,184 304.06,184 cw(c304.06,169.65) 318.41,169.65 R10.2@318.41,154.01
  Top Layer w15: R10.2@318.41,154.01 306.37,154.01 ccw(c306.37,132.52) 284.89,132.52 284.89,47.38 ccw(c303.07,47.38) 303.07,29.2 R17.1@318.46,29.2
A7: R21.1 U2.17 | length 1817.9
  Top Layer w9: v3(23.62,92.05) U2.17@23.62,118.11
  Bottom Layer w15: v3(23.62,92.05) 23.62,73.62 11,61 -27,61 -42.59,76.59 -42.59,606.56 cw(c-9.15,606.56) -9.15,640 89,640 ccw(c89,667) 116,667 116,723 137,744 192,744 216,768 216,824 238,846 640,846 671,815 671,607.44 699.91,578.53 700.89,578.53 711.11,568.31 R21.1@711.11,567.33
A9: R18.2 R19.2 U2.29 | length 1128.4
  Top Layer w9: v3(-197,13) -186.38,23.62 U2.29@-118.11,23.62
  Top Layer w15: R19.2@-248.54,-608.05 R18.2@-248.54,-543.05 v5(-207.47,-543.05)
  Bottom Layer w15: v5(-207.47,-543.05) -312.41,-543.05 cw(c-312.41,-504.46) -351,-504.46 -351,43.93 cw(c-316.93,43.93) -316.93,78 -228,78 cw(c-228,47) -197,47 v3(-197,13)
A10: R29.1 R30.1 U2.30 | length 615.4
  Top Layer w9: v3(-197,-15) -174.13,7.87 U2.30@-118.11,7.87
  Bottom Layer w15: v4(-247.53,-380.05) -294.07,-380.05 cw(c-294.07,-346.12) -328,-346.12 -328,-135 cw(c-284,-135) -284,-91 -234.28,-91 ccw(c-234.28,-53.72) -197,-53.72 v3(-197,-15)
A11: R42.1 U2.31 | length 186.1
  Top Layer w9: R42.1@-248.54,-95.6 -214.6,-95.6 -201,-82 -201,-49 -159.87,-7.87 U2.31@-118.11,-7.87
A12: R31.2 U2.32 | length 374.5
  Top Layer w9: v3@-155,-31 -147.62,-23.62 U2.32@-118.11,-23.62
  Top Layer w15: R31.2@-248.54,-283.05 v5(-207.47,-283.05)
  Bottom Layer w15: v5(-207.47,-283.05) -182.06,-283.05 ccw(c-182.06,-254.99) -154,-254.99 v3(-154,-31)
B0: R32.2 R34.2 U2.18 | length 312.1
  Top Layer w9: U2.18@7.87,118.11 7.87,148.8 cw(c32.2,148.8) 15,166 41.98,192.98 cw(c71,163.96) 71,205 151.42,205 ccw(c151.42,230.58) 177,230.58 v3(177,233.24) R32.2@177,267.54
  Bottom Layer w9: R34.2@176.89,267.48 177,267.48 v3(177,233.24)
B1: R24.2 R25.1 U2.19 | length 265.5
  Top Layer w9: U2.19@-7.87,118.11 -7.87,150.92 cw(c36.08,150.92) 5,182 36.81,213.81 cw(c59,191.62) 59,223 102.76,223 ccw(c102.76,233.24) v3(113,233.24) R24.2@113,267.54
  Bottom Layer w9: R25.1@112.89,267.54 113,267.54 v3(113,233.24)
B2: R25.2 U2.20 | length 379.9
  Top Layer w9: U2.20@-23.62,118.11 -23.62,99.62 ccw(c-11,99.62) v3(-11,87)
  Bottom Layer w9: v3(-11,87) -11,164 cw(c14,164) 14,189 50.6,189 ccw(c50.6,218.4) 80,218.4 80,319.54 cw(c94.93,319.54) 94.93,334.46 R25.2@112.89,334.46
B10: R27.2 U2.21 | length 281.6
  Top Layer w9: U2.21@-39.37,118.11 -39.37,182.48 cw(c-24.49,182.48) -24.49,197.37 -24.12,197 v3(-20.09,197)
  Bottom Layer w15: v3(-20.09,197) -20.09,294.43 cw(c19.95,294.43) 19.95,334.46 R27.2@48.89,334.46
B11: R26.2 R27.1 U2.22 | length 284.5
  Top Layer w9: U2.22@-55.12,118.11 -55.12,197.37 cw(c-24.49,197.37) -24.49,228 9.46,228 ccw(c9.46,267.54) R26.2@49,267.54 v3(49,298)
  Bottom Layer w9: R27.1@48.89,267.54 48.89,298 v3(49,298)
B12: R33.2 R35.2 U2.25 | length 247.4
  Top Layer w9: R33.2@-248.48,154.01 -147.96,154.01 cw(c-147.96,124.16) -118.11,124.16 U2.25@-118.11,86.61
  Top Layer w15: R35.2@-248.48,91.61 R33.2@-248.48,154.01
B13: EN1.2 U2.26 | length 532.3
  Top Layer w9: v3(-168,111) -168,85.34 ccw(c-153.52,85.34) -153.52,70.87 U2.26@-118.11,70.87
  Top Layer w15: v5(-281.06,422.94) EN1.2@-281.06,464.01
  Bottom Layer w15: v5(-281.06,422.94) -208.88,422.94 cw(c-208.88,382.07) -168,382.07 v3(-168,111)
B14: R40.1 U2.27 | length 145.2
  Top Layer w9: R40.1@-248.54,29.2 cw(c-222.62,29.2) -222.62,55.12 U2.27@-118.11,55.12
B15: C5.2 R5.2 R11.2 U2.28 | length 301.5
  Top Layer w9: R5.2@-248.48,-33.2 ccw(c-248.48,-1.72) -217,-1.72 -217,23 cw(c-200.63,23) -200.63,39.37 U2.28@-118.11,39.37
  Top Layer w15: v3(-277,-33) -248.48,-33 R5.2@-248.48,-33.2
  Bottom Layer w15: v3(-277,-33) C5.2@-248.65,-33 R11.2@-248.65,29
C14: ERR1.2 U2.4 | length 1144.7
  Top Layer w9: U2.4@118.14,-39.4 173.4,-39.4 209,-75 209,-165.8 ccw(c236.2,-165.8) 236.2,-193 357.42,-193 ccw(c357.42,-167.42) 383,-167.42 v3(383,-34)
  Bottom Layer w15: v4(317,558) 317,319.42 ccw(c417,319.42) 346.29,248.71 353.71,241.29 cw(c283,170.58) 383,170.58 v3(383,-34)
C15: RUN1.2 U2.5 | length 796.9
  Top Layer w9: U2.5@118.11,-23.62 179.62,-23.62 221,-65 346,-65 357,-54 v3(357,-34)
  Bottom Layer w15: v4(292,464) 292,307.42 ccw(c392,307.42) 321.29,236.71 327.71,230.29 cw(c257,159.58) 357,159.58 v3(357,-34)
D2: R20.2 U2.34 | length 602.6
  Top Layer w9: v3(-178,-75) -158.12,-55.12 U2.34@-118.11,-55.12
  Top Layer w15: R20.2@-248.54,-478.05 v5(-207.47,-478.05)
  Bottom Layer w15: v5(-207.47,-478.05) ccw(c-207.47,-456.57) -186,-456.57 -186,-338 ccw(c-209,-338) -209,-315 -226.07,-315 cw(c-226.07,-297.07) -244,-297.07 -244,-266 cw(c-214,-266) -214,-236 ccw(c-214,-200) -178,-200 v3(-178,-75)
D3: R41.2 U2.35 | length 200.5
  Top Layer w9: R41.2@-248.54,-158 -173,-158 -155.5,-140.5 -155.5,-82.5 -143.87,-70.87 U2.35@-118.11,-70.87
GND: 16v.1 C1.2 C2.2 C3.2 C4.2 C5.1 C6.1 C7.1 C8.1 C9.1 C10.1 C14.1 C15.2 C16.1 C17.1 C18.1 C19.1 C20.2 C21.2 C22.2 D1.A D2.A D3.A D5.A DCIN.2 ENABLE1.1 Hall.1 POW1.2 R6.2 R9.1 R11.1 R18.1 R29.2 R37.2 R39.2 R58.1 SIGIN.3 SIGIN.4 SW.3 SW.5 U1.6 U2.0 U2.1 U2.24 U3.4 U3.5 U3.6 U3.7 U3.8 | length 2114.8
  Top Layer w9: U2.24@-86.61,118.11 -86.61,86.61 ccw(c0,86.61) v2(0,0) ; v4(118.11,-153) U2.1@118.11,-86.61
  Top Layer w13: v5(-203,267.54) R39.2@-142,267.54 cw(c-106.54,267.54) -106.54,303 -46.46,303 ccw(c-46.46,334.46) C18.1@-15,334.46
  Top Layer w15: v4(100,-528) R6.2@129.41,-528
  Top Layer w20: v5(-281.06,515) POW1.2@-281.06,558.01 ; U1.6@287.35,-631 315.7,-631 ccw(c315.7,-593.7) 353,-593.7 v4(353,-533) ; C16.1@318.46,-158 v4(361,-158) ; v4(352.12,-287) C15.2@352.12,-237
  Top Layer w25: U3.4@-236,-1020 U3.5@-17.69,-1020
  Top Layer w30: v8(-383.05,-348.05) R29.2@-315.52,-348.05 ; v8(-371,-543.05) R18.1@-315.46,-543.05 ; C14.1@-141.06,-319.4 cw(c-138.11,-319.4) C14.1@-138.11,-316.46 ; C16.1@318.46,-158 C17.1@318.46,-95.6 ; Hall.1@1014,606.01 v2(1014,724.42)
  Top Layer w45: C20.2@-573,-966.9 cw(c-532.57,-966.9) -532.57,-926.46 C22.2@-354,-926.46
  Bottom Layer w20: C5.1@-315.57,-33 -315.57,-2 ; R11.1@-315.57,29 -315.57,-2 ; v7(-282,-2) -315.57,-2 ; v4(64.41,415) R37.2@111.43,415 ; v7(310,208) cw(c289.56,187.56) 318.46,187.56 R9.1@318.46,92 318.46,-33 C19.1@318.3,-33 ; v4(484.33,347.33) C7.1@531.11,347.33 ; v4(484.33,420.66) C8.1@531.11,420.66 ; v4(484.33,493.99) C9.1@531.11,493.99 ; v4(484.33,567.33) C10.1@531.11,567.33
  other v2: 52,-957 53,-894 2081,271 2032,346 2125,346 2032,433 2125,433 2032,524 2124,524
  other v4: -153,-468 -153,-420.5 -153,-373
  other v6: -33,-33 33,-33 -33,33 33,33
HOA: R43.1 U2.47 | length 915.2
  Top Layer w9: U2.47@70.87,-118.11 v3(70.87,-92.05)
  Top Layer w20: v2(429,-591.94) R43.1@429,-535.4
  Bottom Layer w20: v3(70.87,-92.05) 70.87,-532.77 ccw(c130.04,-532.77) 130.04,-591.94 v2(429,-591.94)
HOB: R44.1 U2.43 | length 1721.3
  Top Layer w9: U2.43@7.87,-118.11 v3(7.87,-92.05)
  Top Layer w20: v2(1020,-611.94) R44.1@1020,-535.4
  Bottom Layer w20: v3(7.87,-92.05) 7.87,-627.67 ccw(c51.21,-627.67) 51.21,-671 990.05,-671 ccw(c990.05,-641.05) 1020,-641.05 v2(1020,-611.94)
HOC: R45.1 U2.39 | length 2517.4
  Top Layer w9: U2.39@-55.12,-118.11 v3(-55.12,-92.05)
  Top Layer w20: v2(1618.95,-591.94) R45.1@1618.95,-535.4
  Bottom Layer w20: v3(-55.12,-92.05) -55.12,-690.34 ccw(c-0.46,-690.34) -0.46,-745 1568.07,-745 ccw(c1568.07,-694.12) 1618.95,-694.12 v2(1618.95,-591.94)
IA: Q7.3 Q8.3 R32.1 R52.1 R55.2 | length 677.8
  Top Layer w20: R32.1@177,334.46 390.58,334.46 cw(c390.58,234.46) 461.29,305.18 497.73,268.73 540.47,225.99 cw(c470.48,156) 569.46,156 R52.1@569.46,-39.99
IB: Q9.3 Q10.3 R33.1 R53.1 R56.2 | length 2511.6
  Top Layer w22: R33.1@-315.41,154.01 -315.41,154.99 -322.13,161.71 -323.11,161.71 -337,175.6 -337,581 cw(c-295,581) -295,623 506.89,623 cw(c506.89,523) 606.89,523 606.89,230.01 ccw(c706.89,230.01) 706.89,130.01 1107.36,130.01 cw(c1107.36,72.9) 1164.46,72.9 R53.1@1164.46,-36.99
ISUM: Q11.3 Q12.3 R16.1 R24.1 R26.1 R54.1 R55.1 R56.1 R58.2 | length 1127.2
  Top Layer w15: R24.1@113,334.46 113,318.7 ccw(c130.69,318.7) 130.69,301.01 323.99,301.01 cw(c323.99,252.11) 372.89,252.11 372.89,122.77 cw(c341.73,122.77) 341.73,91.61 ; R16.1@318.46,91.61 341.73,91.61 ; v2(535,91.61) 341.73,91.61
  Top Layer w20: R26.1@49,334.46 R24.1@113,334.46 ; v2(724,182) 724,274 cw(c727.25,274) R55.1@724.95,276.3
  Bottom Layer w20: v2(535,91.61) 679.2,91.61 ccw(c679.2,136.4) 724,136.4 v2(724,182)
LOA: R49.1 U2.45 | length 1619.5
  Top Layer w9: U2.45@39.37,-118.11 v3(39.37,-92.05)
  Top Layer w20: v2(429,-258) R49.1@429,-201.46
  Bottom Layer w20: v3(39.37,-92.05) 39.37,-579.12 ccw(c93.25,-579.12) 93.25,-633 435.03,-633 ccw(c435.03,-586.03) 482,-586.03 482,-501.73 ccw(c438.27,-501.73) 438.27,-458 363.12,-458 cw(c363.12,-410.88) 316,-410.88 316,-300.97 cw(c358.97,-300.97) 358.97,-258 v2(429,-258)
LOB: R50.1 U2.41 | length 2233.2
  Top Layer w9: U2.41@-23.62,-118.11 v3(-23.62,-92.05)
  Top Layer w20: R50.1@1020,-201.46 1020,-389.83 ccw(c1046.17,-389.83) 1046.17,-416 v2(1073,-416)
  Bottom Layer w20: v3(-23.62,-92.05) -23.62,-667.43 ccw(c15.95,-667.43) 15.95,-707 992,-707 ccw(c992,-626) 1073,-626 v2(1073,-416)